# EAGLE board XMICRO-6502 (EAGLE 6.3), part 1 of 2
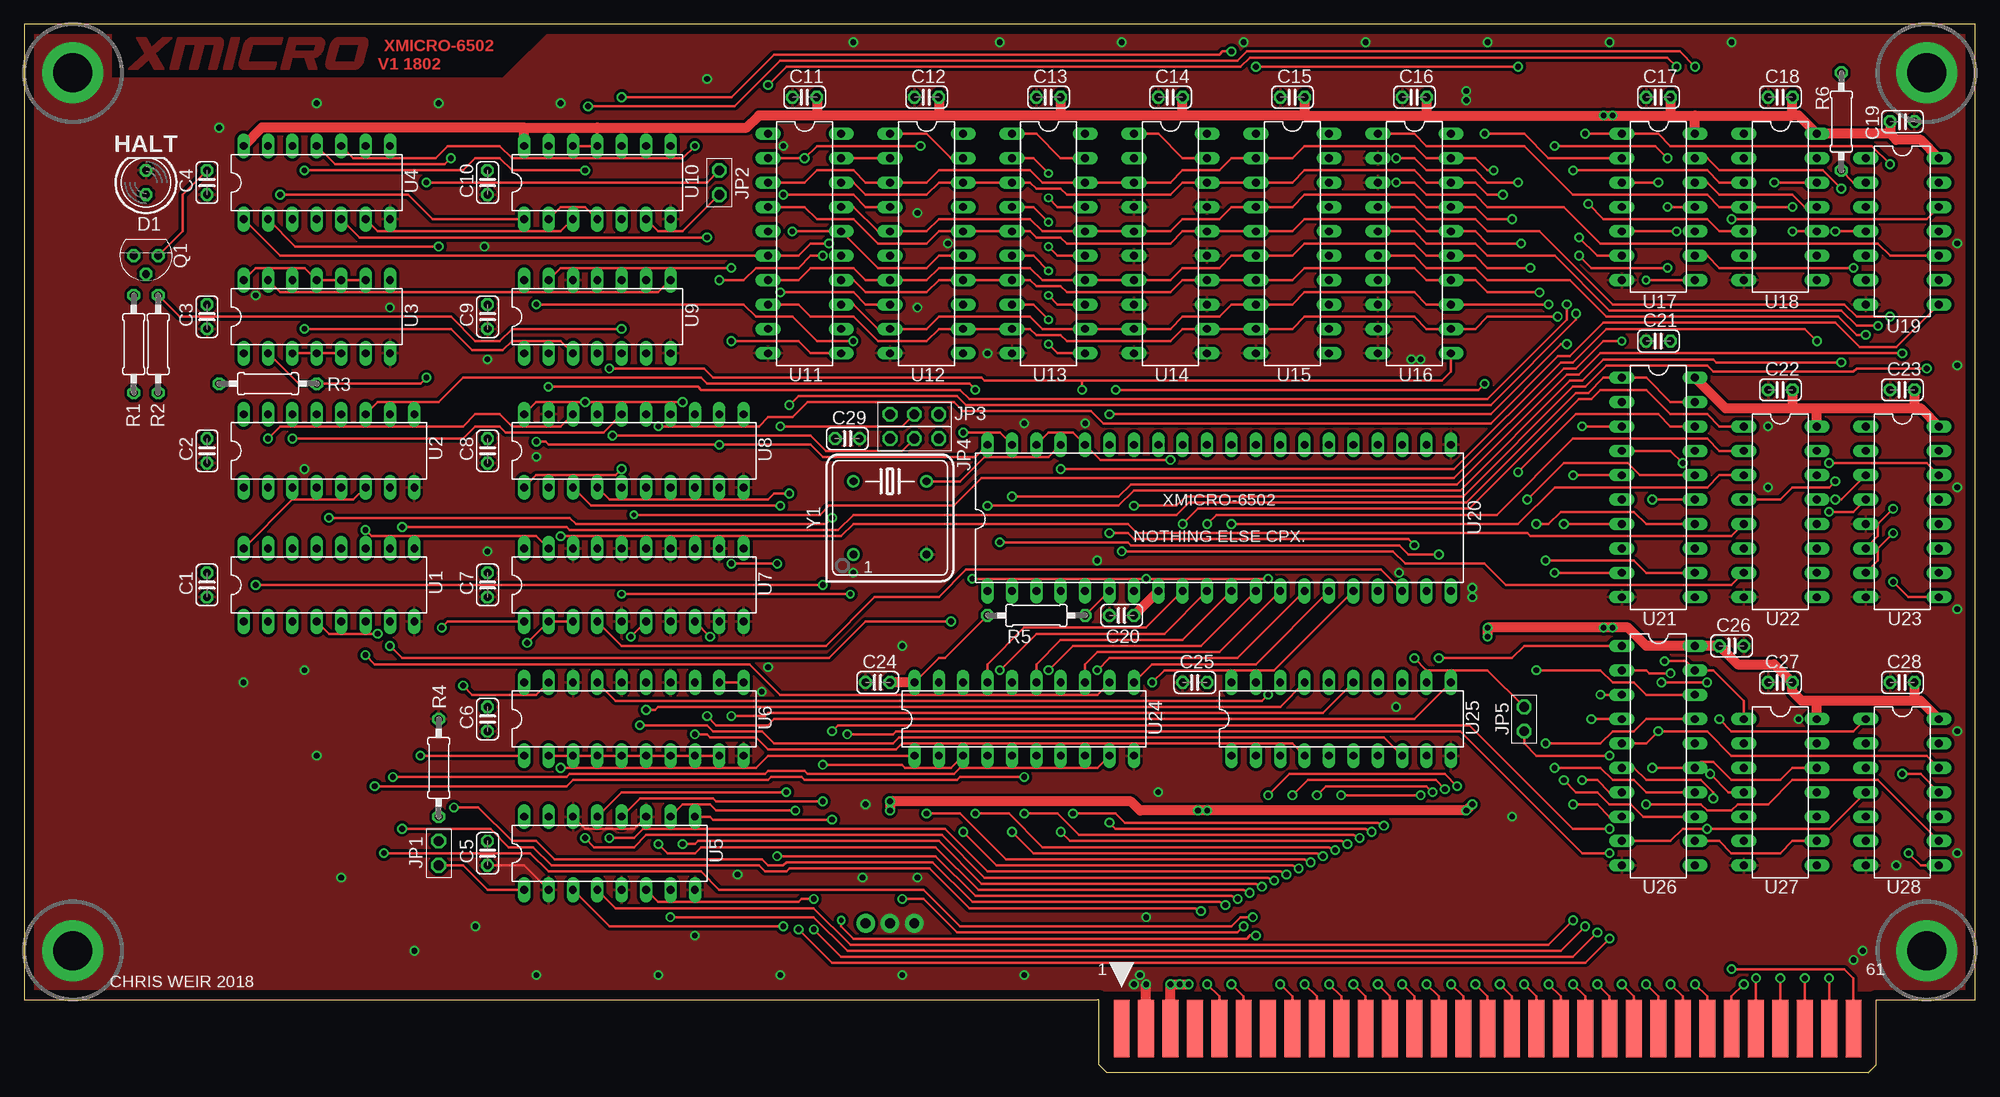
[diagram p0: board, top side]
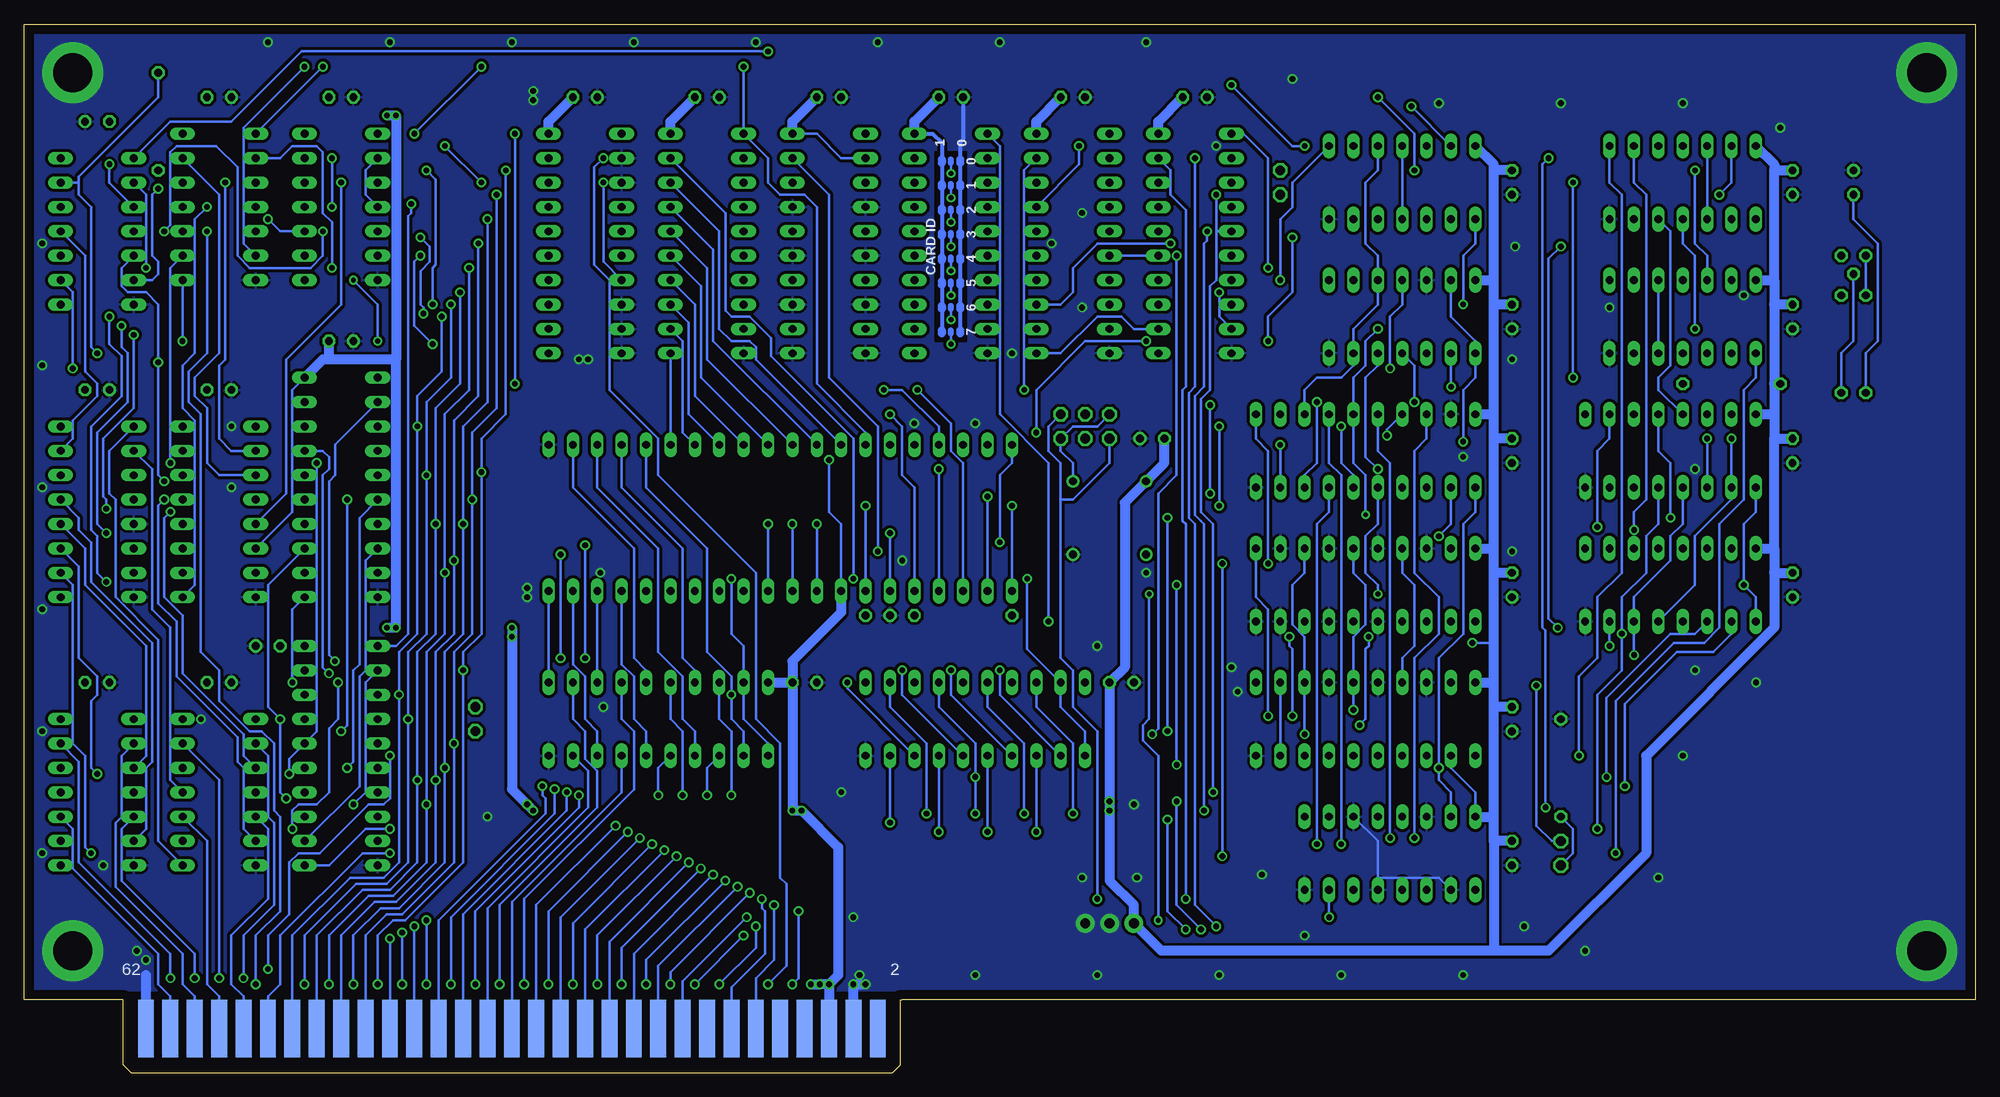
[diagram p1: board, bottom side, seen from below]

Size 203.2 x 109.22 mm. Coordinates in mm from the lower left corner, seen from the top.
Outline: 111.76,7.62 0,7.62 0,109.22 203.2,109.22 203.2,7.62 193.04,7.62
Copper layers (1*16): Top 0.035mm / dielectric 1.5mm / Bottom 0.035mm
Design rules "default *": minimum track width 10mil, minimum drill 0.3mm, track to track 10mil, track to pad 10mil, pad to pad 10mil, via to via 10mil, smd to smd 10mil, copper to edge 40mil, drill to drill 10mil, minimum pad ring 10mil, minimum via ring 8mil, stop-mask expansion 4mil, vias tented up to drill 100mil, thermal gap 10mil
Net classes: 1 GND: width 0.254 mm, clearance 0.305 mm
bRestrict: area 105.1,76.2 to 108.3,95.9

## Footprints (pad centres in the part's own frame; a part is rotated, then mirrored left to right if it is on the bottom)
C025-024X044 = drill 0.813 octagon: 1 -1.27,0; 2 1.27,0
LED5MM = drill 0.813 octagon: A -1.27,0; K 1.27,0
1X02 = drill 1.016 octagon: 1 -1.27,0; 2 1.27,0
1X03 = drill 1.016 octagon: 1 -2.54,0; 2 0,0; 3 2.54,0
EDGE62M = smd 1.651 x 5.969: 1 -38.1,-3.01; 3 -35.56,-3.01; 5 -33.02,-3.01; 7 -30.48,-3.01; 9 -27.94,-3.01; 11 -25.4,-3.01; 13 -22.86,-3.01; 15 -20.32,-3.01; 17 -17.78,-3.01; 19 -15.24,-3.01; 21 -12.7,-3.01; 23 -10.16,-3.01; 25 -7.62,-3.01; 27 -5.08,-3.01; 29 -2.54,-3.01; 31 0,-3.01; 33 2.54,-3.01; 35 5.08,-3.01; 37 7.62,-3.01; 39 10.16,-3.01; 41 12.7,-3.01; 43 15.24,-3.01; 45 17.78,-3.01; 47 20.32,-3.01; 49 22.86,-3.01; 51 25.4,-3.01; 53 27.94,-3.01; 55 30.48,-3.01; 57 33.02,-3.01; 59 35.56,-3.01; 61 38.1,-3.01 | smd 1.651 x 5.969 bottom: 2 -38.1,-3.01; 4 -35.56,-3.01; 6 -33.02,-3.01; 8 -30.48,-3.01; 10 -27.94,-3.01; 12 -25.4,-3.01; 14 -22.86,-3.01; 16 -20.32,-3.01; 18 -17.78,-3.01; 20 -15.24,-3.01; 22 -12.7,-3.01; 24 -10.16,-3.01; 26 -7.62,-3.01; 28 -5.08,-3.01; 30 -2.54,-3.01; 32 0,-3.01; 34 2.54,-3.01; 36 5.08,-3.01; 38 7.62,-3.01; 40 10.16,-3.01; 42 12.7,-3.01; 44 15.24,-3.01; 46 17.78,-3.01; 48 20.32,-3.01; 50 22.86,-3.01; 52 25.4,-3.01; 54 27.94,-3.01; 56 30.48,-3.01; 58 33.02,-3.01; 60 35.56,-3.01; 62 38.1,-3.01
TO92 = drill 0.813 octagon: 1 -1.27,0; 2 0,1.905; 3 1.27,0
0207/10 = drill 0.813 octagon: 1 -5.08,0; 2 5.08,0
DIL16 = drill 0.813 long: 1 -8.89,-3.81; 2 -6.35,-3.81; 3 -3.81,-3.81; 4 -1.27,-3.81; 5 1.27,-3.81; 6 3.81,-3.81; 7 6.35,-3.81; 8 8.89,-3.81; 9 8.89,3.81; 10 6.35,3.81; 11 3.81,3.81; 12 1.27,3.81; 13 -1.27,3.81; 14 -3.81,3.81; 15 -6.35,3.81; 16 -8.89,3.81
DIL14 = drill 0.813 long: 1 -7.62,-3.81; 2 -5.08,-3.81; 3 -2.54,-3.81; 4 0,-3.81; 5 2.54,-3.81; 6 5.08,-3.81; 7 7.62,-3.81; 8 7.62,3.81; 9 5.08,3.81; 10 2.54,3.81; 11 0,3.81; 12 -2.54,3.81; 13 -5.08,3.81; 14 -7.62,3.81
DIL20 = drill 0.813 long: 1 -11.43,-3.81; 2 -8.89,-3.81; 3 -6.35,-3.81; 4 -3.81,-3.81; 5 -1.27,-3.81; 6 1.27,-3.81; 7 3.81,-3.81; 8 6.35,-3.81; 9 8.89,-3.81; 10 11.43,-3.81; 11 11.43,3.81; 12 8.89,3.81; 13 6.35,3.81; 14 3.81,3.81; 15 1.27,3.81; 16 -1.27,3.81; 17 -3.81,3.81; 18 -6.35,3.81; 19 -8.89,3.81; 20 -11.43,3.81
DIL40 = drill 0.813 long: 1 -24.13,-7.62; 2 -21.59,-7.62; 3 -19.05,-7.62; 4 -16.51,-7.62; 5 -13.97,-7.62; 6 -11.43,-7.62; 7 -8.89,-7.62; 8 -6.35,-7.62; 9 -3.81,-7.62; 10 -1.27,-7.62; 11 1.27,-7.62; 12 3.81,-7.62; 13 6.35,-7.62; 14 8.89,-7.62; 15 11.43,-7.62; 16 13.97,-7.62; 17 16.51,-7.62; 18 19.05,-7.62; 19 21.59,-7.62; 20 24.13,-7.62; 21 24.13,7.62; 22 21.59,7.62; 23 19.05,7.62; 24 16.51,7.62; 25 13.97,7.62; 26 11.43,7.62; 27 8.89,7.62; 28 6.35,7.62; 29 3.81,7.62; 30 1.27,7.62; 31 -1.27,7.62; 32 -3.81,7.62; 33 -6.35,7.62; 34 -8.89,7.62; 35 -11.43,7.62; 36 -13.97,7.62; 37 -16.51,7.62; 38 -19.05,7.62; 39 -21.59,7.62; 40 -24.13,7.62
DIL08S = drill 0.813: 1 -3.81,-3.81; 4 3.81,-3.81; 5 3.81,3.81; 8 -3.81,3.81

## Placement (x,y rotation side)
C1  0.1uF  [C025-024X044]  19.05,50.8 270 top
C2  0.1uF  [C025-024X044]  19.05,64.77 270 top
C3  0.1uF  [C025-024X044]  19.05,78.74 270 top
C4  0.1uF  [C025-024X044]  19.05,92.71 270 top
C5  0.1uF  [C025-024X044]  48.26,22.86 270 top
C6  0.1uF  [C025-024X044]  48.26,36.83 270 top
C7  0.1uF  [C025-024X044]  48.26,50.8 270 top
C8  0.1uF  [C025-024X044]  48.26,64.77 270 top
C9  0.1uF  [C025-024X044]  48.26,78.74 270 top
C10  0.1uF  [C025-024X044]  48.26,92.71 270 top
C11  0.1uF  [C025-024X044]  81.28,101.6 180 top
C12  0.1uF  [C025-024X044]  93.98,101.6 180 top
C13  0.1uF  [C025-024X044]  106.68,101.6 180 top
C14  0.1uF  [C025-024X044]  119.38,101.6 180 top
C15  0.1uF  [C025-024X044]  132.08,101.6 180 top
C16  0.1uF  [C025-024X044]  144.78,101.6 180 top
C17  0.1uF  [C025-024X044]  170.18,101.6 180 top
C18  0.1uF  [C025-024X044]  182.88,101.6 180 top
C19  0.1uF  [C025-024X044]  195.58,99.06 0 top
C20  0.1uF  [C025-024X044]  114.3,47.62 180 top
C21  0.1uF  [C025-024X044]  170.18,76.2 180 top
C22  0.1uF  [C025-024X044]  182.88,71.12 180 top
C23  0.1uF  [C025-024X044]  195.58,71.12 180 top
C24  0.1uF  [C025-024X044]  88.9,40.64 180 top
C25  0.1uF  [C025-024X044]  121.92,40.64 180 top
C26  0.1uF  [C025-024X044]  177.8,44.45 0 top
C27  0.1uF  [C025-024X044]  182.88,40.64 180 top
C28  0.1uF  [C025-024X044]  195.58,40.64 180 top
C29  0.1uF  [C025-024X044]  85.72,66.04 0 top
D1  RED  [LED5MM]  12.7,92.71 90 top
JP1  PINHD-1X2THRU  [1X02]  43.18,22.86 270 top
JP2  PINHD-1X2THRU  [1X02]  72.39,92.71 90 top
JP3  PINHD1X3THRU  [1X03]  92.71,68.58 180 top
JP4  PINHD1X3THRU  [1X03]  92.71,66.04 180 top
JP5  PINHD-1X2THRU  [1X02]  156.21,36.83 90 top
PC0  XMICRO-BUS-EDGE62M  [EDGE62M]  152.4,7.62 0 top
Q1  2N4403  [TO92]  12.7,85.09 180 top
R1  270  [0207/10]  11.43,75.88 90 top
R2  22k  [0207/10]  13.97,75.88 270 top
R3  10k  [0207/10]  25.4,71.76 180 top
R4  10k  [0207/10]  43.18,31.75 270 top
R5  10k  [0207/10]  105.41,47.62 180 top
R6  470  [0207/10]  189.23,99.06 270 top
U1  74138  [DIL16]  31.75,50.8 0 top
U2  74138  [DIL16]  31.75,64.77 0 top
U3  7410  [DIL14]  30.48,78.74 0 top
U4  7404  [DIL14]  30.48,92.71 0 top
U5  74257  [DIL16]  60.96,22.86 0 top
U6  74688  [DIL20]  63.5,36.83 0 top
U7  74688  [DIL20]  63.5,50.8 0 top
U8  74244  [DIL20]  63.5,64.77 0 top
U9  7474  [DIL14]  59.69,78.74 0 top
U10  7474  [DIL14]  59.69,92.71 0 top
U11  74273  [DIL20]  81.28,86.36 270 top
U12  74244  [DIL20]  93.98,86.36 270 top
U13  74244  [DIL20]  106.68,86.36 270 top
U14  74244  [DIL20]  119.38,86.36 270 top
U15  74245  [DIL20]  132.08,86.36 270 top
U16  74574  [DIL20]  144.78,86.36 270 top
U17  7400  [DIL14]  170.18,90.17 270 top
U18  7408  [DIL14]  182.88,90.17 270 top
U19  7404  [DIL14]  195.58,87.63 270 top
U20  W65C02S  [DIL40]  124.46,57.78 0 top
U21  74244  [DIL20]  170.18,60.96 270 top
U22  74138  [DIL16]  182.88,58.42 270 top
U23  74148  [DIL16]  195.58,58.42 270 top
U24  74244  [DIL20]  104.14,36.83 0 top
U25  74244  [DIL20]  137.16,36.83 0 top
U26  74273  [DIL20]  170.18,33.02 270 top
U27  7432  [DIL14]  182.88,29.21 270 top
U28  7432  [DIL14]  195.58,29.21 270 top
Y1  4MHz  [DIL08S]  90.17,57.78 0 top

## Library data of the parts
C1-C29 R1-R6 = resistor
D1 = led
JP1-JP5 PC0 Q1 U20 = Custom
U1-U19 U21-U28 = 74xx-us
Y1 = crystal; OC_FARNELL: unknown; OC_NEWARK: unknown

## Nets
!BBUSACK: PC0.20 U8.7
!BCBR: PC0.12 U4.11
!BCSX: PC0.9 U1.4 U2.5
!BFETCH: PC0.19 U8.14
!BHALT: PC0.17 U8.5
!BINH: PC0.11 U17.11
!BINT: PC0.51 U18.10
!BIRQ0: PC0.53 U27.2
!BIRQ1: PC0.54 U27.5
!BIRQ2: PC0.55 U27.13
!BIRQ3: PC0.56 U27.10
!BIRQ4: PC0.57 U28.5
!BIRQ5: PC0.58 U28.2
!BIRQ6: PC0.59 U28.13
!BIRQ7: PC0.60 U28.10
!BIRQX: PC0.52 U10.8
!BNMI: JP5.1 PC0.61
!BRD: PC0.21 U1.5 U2.2 U8.18
!BRST: PC0.14 U8.11
!BUSACK: U8.13 U9.6 U9.10 U10.10
!BWAIT: PC0.18 U3.1
!BWR: PC0.22 U2.3 U8.16
!CINT: U18.8 U20.4
!CS0_READ: U2.11 U12.1 U12.19
!CS0_WRITE: U2.13 U4.5 U11.11
!CS1_READ: U2.10 U21.1 U21.19
!CS1_WRITE: U2.12 U26.11
!HALT: R2.1 U8.15 U17.8
!IVG: U18.9 U23.14
!IVP: U16.1 U18.4 U22.9
!MLB: U18.2 U20.5
!RD: U8.2 U17.3 U22.5
!RST: U8.9 U9.1 U9.13 U11.1 U18.5 U20.40 U26.1
!VPB: U19.5 U20.1 U22.4
!WAIT_BANKSW: JP2.2 R3.1 U3.2
!WAIT_DMA: U3.13 U9.8
!WR: U8.4 U17.6
A0: U20.9 U22.1 U24.17
A1: U18.12 U20.10 U22.2 U24.2
A2: U18.13 U20.11 U22.3 U24.15
A3: U20.12 U24.4
A4: U20.13 U24.13
A5: U20.14 U24.6
A6: U20.15 U24.11
A7: U20.16 U24.8
A8: U20.17 U25.6
A9: U7.4 U20.18 U25.13
A10: U7.6 U20.19 U25.8
A11: U7.8 U20.20 U25.11
A12: U7.11 U20.22 U25.15
A13: U6.13 U7.13 U20.23 U25.4
A14: U6.15 U7.15 U20.24 U25.17
A15: U6.17 U7.17 U20.25 U25.2
BA0: PC0.23 U1.1 U2.1 U24.3
BA1: PC0.24 U24.18
BA2: PC0.25 U24.5
BA3: PC0.26 U24.16
BA4: PC0.27 U24.7
BA5: PC0.28 U1.2 U24.14
BA6: PC0.29 U1.3 U24.9
BA7: PC0.30 U1.6 U2.4 U24.12
BA8: PC0.31 U25.14
BA9: PC0.32 U25.7
BA10: PC0.33 U25.12
BA11: PC0.34 U25.9
BA12: PC0.35 U25.5
BA13: PC0.36 U25.16
BA14: PC0.37 U25.3
BA15: PC0.38 U25.18
BA16: PC0.39 U5.4
BA17: PC0.40 U5.7
BA18: PC0.41 U5.9
BA19: PC0.42 U5.12
BCLK: JP3.1 JP4.3 PC0.15
BD0: PC0.43 U11.3 U12.3 U13.18 U14.3 U15.2 U16.19 U21.18 U26.18
BD1: PC0.44 U11.18 U12.18 U13.3 U14.18 U15.3 U16.18 U21.16 U26.17
BD2: PC0.45 U11.17 U12.5 U13.16 U14.5 U15.4 U16.17 U21.14 U26.14
BD3: PC0.46 U11.4 U12.16 U13.5 U14.16 U15.5 U16.16 U21.12 U26.13
BD4: PC0.47 U11.7 U12.7 U13.14 U14.7 U15.6 U16.15 U21.9 U26.8
BD5: PC0.48 U11.14 U12.14 U13.7 U14.14 U15.7 U16.14 U21.7 U26.7
BD6: PC0.49 U11.13 U12.9 U13.12 U14.9 U15.8 U16.13 U21.5 U26.4
BD7: PC0.50 U11.8 U12.12 U13.9 U14.12 U15.9 U16.12 U21.3 U26.3
CPUINH: U5.15 U8.1 U9.5 U15.19 U24.1 U24.19 U25.1 U25.19
GND [GND]: C1.2 C2.2 C3.2 C4.2 C5.2 C6.2 C7.2 C8.2 C9.2 C10.2 C11.2 C12.2 C13.2 C14.2 C15.2 C16.2 C17.2 C18.2 C19.2 C20.2 C21.2 C22.2 C23.2 C24.2 C25.2 C26.2 C27.2 C28.2 C29.2 D1.K PC0.3 PC0.4 PC0.62 R4.1 U1.8 U2.8 U3.7 U4.7 U5.2 U5.5 U5.8 U5.11 U5.14 U6.10 U6.14 U6.16 U6.18 U7.5 U7.7 U7.9 U7.10 U7.12 U7.14 U7.16 U7.18 U8.10 U8.19 U9.7 U9.12 U10.7 U11.10 U12.10 U13.10 U14.4 U14.6 U14.8 U14.10 U14.11 U14.13 U14.15 U14.17 U15.10 U16.2 U16.3 U16.8 U16.9 U16.10 U17.7 U18.7 U19.7 U20.21 U21.10 U22.8 U23.5 U23.8 U24.10 U25.10 U26.10 U27.7 U28.7 Y1.4
ID0: U13.2
ID1: U13.17
ID2: U13.4
ID3: U13.15
ID4: U13.6
ID5: U13.13
ID6: U13.8
ID7: U13.11
N$1: U3.12 U19.1
N$2: U17.5 U19.4
N$3: JP2.1 U10.6
N$4: U15.1 U17.1 U19.3 U20.34
N$5: JP1.2 R4.2 U5.1
N$6: U16.4 U23.9
N$7: U16.5 U23.7
N$8: U4.6 U10.3
N$9: JP3.2 U8.3
N$10: U4.1 U11.6 U12.13
N$11: U17.10 U19.12
N$12: U9.2 U18.3
N$13: U19.11 U23.15
N$14: U17.13 U19.6
N$15: U14.1 U14.19 U22.7
N$16: U10.13 U18.6
N$17: U4.10 U18.1
N$18: U16.6 U23.6
N$19: U4.8 U6.1
N$20: Q1.2 R2.2
N$21: R6.2 U17.9 U19.2
N$22: U17.12 U18.11
N$23: U4.3 U4.12
N$24: Q1.3 R1.2
N$25: U4.4 U9.3
N$26: D1.A R1.1
N$27: JP1.1 U6.19
N$28: U15.11 U20.26
N$29: U15.12 U20.27
N$30: U15.13 U20.28
N$31: U15.14 U20.29
N$32: U15.15 U20.30
N$33: U15.16 U20.31
N$34: U15.17 U20.32
N$35: U15.18 U20.33
N$36: JP4.2 U8.17
N$37: JP5.2 R5.1 U20.6
N$40: U5.3 U11.2 U12.17
N$41: U5.6 U11.19 U12.2
N$42: U5.10 U11.16 U12.15
N$43: U5.13 U11.5 U12.4
N$45: U11.15 U12.6
N$49: U19.9 U20.7
N$50: U1.7 U13.1 U13.19
N$51: U8.6 U19.8
N$52: U23.10 U28.8
N$53: U4.9 U7.19
N$55: U16.7 U19.10
N$56: U11.12 U12.11
N$57: U11.9 U12.8
N$61: U4.2 U7.1
N$92: U23.11 U28.11
N$93: U23.12 U28.3
N$94: U23.13 U28.6
N$95: U23.1 U27.8
N$96: U23.2 U27.11
N$97: U23.3 U27.6
N$98: U23.4 U27.3
N$99: U21.17 U26.2 U28.9
N$100: U21.15 U26.5 U28.12
N$101: U21.13 U26.6 U28.1
N$102: U21.11 U26.9 U28.4
N$103: U21.8 U26.12 U27.9
N$104: U21.6 U26.15 U27.12
N$105: U21.4 U26.16 U27.4
N$106: U21.2 U26.19 U27.1
PH0: JP3.3 JP4.1 U17.2 U17.4 U20.37 Y1.5
PH1: U9.11 U16.11 U20.3
PH2: U4.13 U10.1 U20.39
RDY: R6.1 U19.13 U20.2
VCC: C1.1 C2.1 C3.1 C4.1 C5.1 C6.1 C7.1 C8.1 C9.1 C10.1 C11.1 C12.1 C13.1 C14.1 C15.1 C16.1 C17.1 C18.1 C19.1 C20.1 C21.1 C22.1 C23.1 C24.1 C25.1 C26.1 C27.1 C28.1 C29.1 PC0.5 PC0.6 Q1.1 R3.2 R5.2 U1.16 U2.6 U2.16 U3.3 U3.4 U3.5 U3.9 U3.10 U3.11 U3.14 U4.14 U5.16 U6.2 U6.3 U6.4 U6.5 U6.6 U6.7 U6.8 U6.9 U6.11 U6.12 U6.20 U7.2 U7.3 U7.20 U8.8 U8.20 U9.4 U9.14 U10.2 U10.4 U10.11 U10.12 U10.14 U11.20 U12.20 U13.20 U14.2 U14.20 U15.20 U16.20 U17.14 U18.14 U19.14 U20.8 U20.36 U20.38 U21.20 U22.6 U22.16 U23.16 U24.20 U25.20 U26.20 U27.14 U28.14 Y1.8